# Altium PCB ESP32_PCB.PcbDoc (part 2 of 2)
Units mil, origin at the board's own origin, x right, y up, seen from the top; angles counter-clockwise.
Board outline 2700 x 1000 mil, 4 copper layers (L1, L2, L3, L4), stack 61.581 mil thick; 64 components, 73 nets, 299 pads, 161 vias.
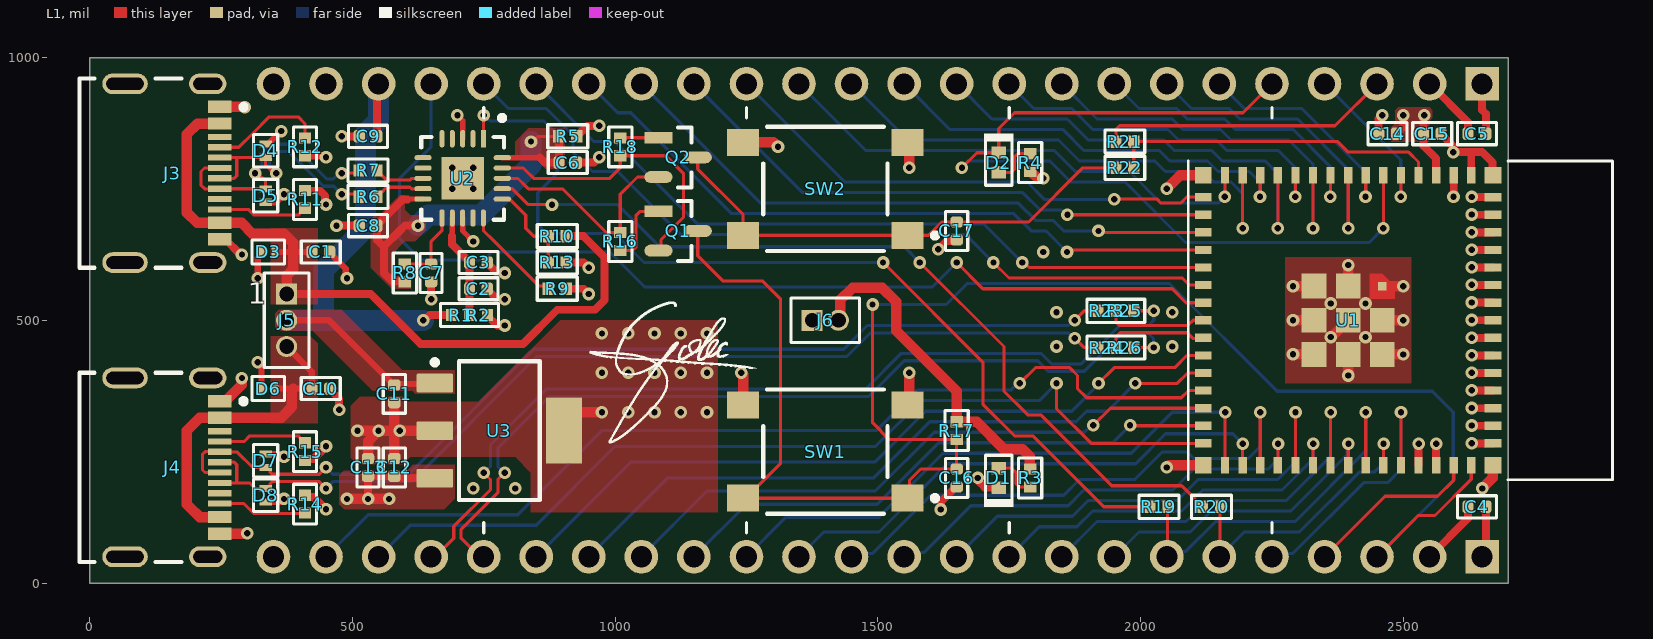
[diagram p0: L1 view]

## Via types
v1: diameter 24, hole 12, L1 to L4, tented both sides, 161 vias

## Nets (pads, with @x,y where several pads share a name; then routed paths per layer and width w, separated by ;. In a path a pad name is that pad's centre, name@x,y a point inside that pad or via, vN(x,y) a via of type N, cw(c..) or ccw(c..) an arc to the next point about the centre after c; other vN are vias at no path point) (continued)
+3V3: (continued)
  L1 w15: R2.1 757.01,508.82 775.83,490 v1(790,490) ; R5.1 927.01,851.18 930.14,854.31 931.32,854.31 947.01,870 v1(970,870) ; C14.2 2486.93,856.18 2490.06,859.31 2491.21,859.31 2500,868.1 v1(2500,890) ; v1(2540,890) 2538.07,888.07 2538.07,831.93 2562.36,807.64 U1.3 ; J1.2 2623.07,876.93 C5.2 ; J2.1 2656.93,56.93 C4.2
  L1 w20: J6.2 1428.83,503.83 1428.83,538.83 1452,562 1508,562 1535,535 1535,480 1650,365 R17.2 1687.99,307.01 1740,255 1775,255 1789.06,240.94 1789.06,217.64 1789.69,217.01 R3.2 ; R4.2 1791.18,782.99 1804.17,770 v1(1815,770)
  L2 w15: v1(2500,890) v1(2540,890)
  L2 w20: 2516.57,830 2516.57,813.43 2563.39,766.61 2563.39,336.61 2595,305 2595,105 J2.1
  L2 w40: v1(790,490) 799.4,490 832,522.6 832,607.4 790,649.4 790,849.4 822.6,882 830,882 958,882 v1(970,870) 1110,870 1255,725 1420,725 ; J6.2 1425,720 1420,725 ; J1.2 2545.41,945.41 2545.41,895.41 v1(2540,890) 2540,853.43 2516.57,830 1875,830 v1(1815,770) 1770,725 1420,725
+3V3_FTDI: C6.2 C8.2 R5.2 R8.1 U2.10 U2.20 | length 857.3
  L1 w6: v1(840,840) 843.79,840 853.79,850 R5.2
  L1 w10.01: 605,730 605.63,730.63 U2.10 ; U2.20 857.1,809.37
  L1 w15: C8.2 546.93,653.07 560,640 ; C8.2@546.93,681.18 595.75,730 605,730 ; R8.1 599.37,573.63 576.37,573.63 560,590 560,640 ; v1(625,680) 600,680 590,670 560,640 ; 857.1,809.37 866.47,800 C6.2 ; R5.2 R5.2 C6.2@893.03,801.22
  L4 w40: v1(625,680) 645,700 745,700 840,795 v1(840,840)
+3V3_REG: C12.2 C13.2 J6.1 U3.3 | length 1238.4
  L1 w15: v1(530,160) C13.2 C12.2 583.07,200 656.42,200 U3.3
  L1 w20: v1(490,160) v1(530,160) v1(570,160)
  L2 w40: v1(570,160) 595,160 660,225 ; 1335,460 J6.1
  L2 w60: 660,225 708,273 1218,273 1335,390 1335,460
+5V: C9.2 C11.2 J1.22 J5.2 R1.1 U3.1 | length 1247.3
  L1 w12: J5.2 455.75,500 578.82,376.93 C11.2 581.81,378.74 655.16,378.74 U3.1
  L1 w15: C9.2 546.93,946.93 J1.22 ; v1(635,500) 637.44,500 647.44,510 R1.1
  L4 w40: J5.2 445,500 ; J1.22 550,880 525,855 525,675.6 445,595.6 445,500 ; v1(635,500) 445,500
+5V_VBUS1: C1.2 D3.2 J3.A4B9 J3.B4A9 J5.1 R10.2 | length 1469.7
  L1 w12: D3.2 387.93,630 C1.2
  L1 w15: J5.1 535,550 630,455 825,455 890,520 961.72,520 980,538.28 980,620 940,660 R10.2
  L1 w20: J3.A4B9 205.59,874.41 185,853.82 185,705 204.57,685.43 J3.B4A9 289.57,685.43 310,665 370,665 387.93,647.07 387.93,630 387.93,597.93 375,585 J5.1
+5V_VBUS2: C10.2 D6.2 J4.A4B9 J4.B4A9 J5.3 | length 637.8
  L1 w12: D6.2 387.93,370 C10.2 423.07,401.93 J5.3
  L1 w20: J4.B4A9 209.41,125.59 190,145 185,150 185,290 209.57,314.57 J4.A4B9 364.57,314.57 385,335 385,367.07 387.93,370
+VCC_FTDI: C2.2 C3.2 R1.2 R2.2 U2.12 | length 198.4
  L1 w10.01: 690,660 690.32,660.32 U2.12
  L1 w15: 690,660 690,644.25 723.07,611.18 C3.2 C2.2 723.03,559.96 R1.2 R1.2
BTN_GPIO0: C17.2 Q2.3 R22.1 SW2.1 SW2.2 | length 947
  L1 w6: Q2.3 1157.42,787.58 1243.5,701.5 SW2.2 SW2.1 1596.42,661.42 1621.93,686.93 C17.2 1786.93,686.93 1890,790 R22.1
CHIP_PU: C16.2 J2.3 Q1.3 R17.1 SW1.1 SW1.2 U1.45 | length 3372.2
  L1 w6: Q1.3 1157.42,622.58 1205,575 1280,575 1315,540 1315,227.99 SW1.2@1248.43,161.42 ; SW1.2 SW1.2@1248.43,161.42 ; v1(1490,530) 1490,305 1522.01,272.99 R17.1 C16.2 1581.93,216.93 1560,195 1560,164.92 SW1.1 SW1.2@1248.43,161.42 ; J2.3 2528.46,128.46 2560.28,128.46 2629.29,197.48 U1.45
  L4 w6: v1(1490,530) 1630,530 1670,570 2055,570 2260,365 2555,365 2595,325 2595,195 J2.3
CON1_USB_N: D4.2 J3.A7 J3.B7 R6.1 | length 445.4
  L1 w6.03: J3.A7 247.72,770 275,770 280,775 280,809.72 ; J3.B7 247.91,809.72 280,809.72 ; v1(355,780) 350.53,780 335,795.53 D4.2 334.72,809.72 280,809.72 ; v1(480,740) 507.99,740 R6.1
  L4 w6.03: v1(355,780) 342.01,792.99 342.01,812.01 350.97,820.97 379.19,820.97 445.16,755 465,755 v1(480,740)
CON1_USB_P: D5.2 J3.A6 J3.B6 R7.1 | length 500.8
  L1 w6.03: J3.A6 218.76,789.76 212,783 212,757 219,750 247.24,750 J3.B6 247.83,750.2 334.8,750.2 D5.2 335,764.47 319.47,780 v1(315,780) ; v1(480,780) 507.99,780 R7.1
  L4 w6.03: v1(315,780) 327.99,792.99 327.99,817.83 345.16,835 385,835 450.97,769.03 464.17,769.03 475.14,780 v1(480,780)
CON2_USB_N: D7.2 J4.A7 J4.B7 R23.1 | length 1931.3
  L1 w6.03: J4.A7 219.76,210.24 215,215 215,245 220,250 247.24,250 J4.B7 280.39,249.61 310,220 D7.2 339.92,220 343.8,216.13 343.8,210.55 347.33,207.01 437.01,207.01 v1(450,220) ; v1(1875,500) 1893,518 R23.1
  L4 w6.03: v1(450,220) 462.99,207.01 607.17,207.01 845.16,445 1435.16,445 1480.17,490.01 1862.48,490.01 1872.47,500 v1(1875,500)
CON2_USB_P: D8.2 J4.A6 J4.B6 R24.1 | length 1892.6
  L1 w6.03: J4.B6 304.45,190.55 315,180 D8.2 339.92,180 343.8,183.87 343.8,189.45 347.33,192.99 437.01,192.99 v1(450,180) ; J4.A6 247.72,230 275,230 280,225 280,191.09 279.82,190.91 ; v1(1875,466) 1893,448 R24.1
  L4 w6.03: v1(450,180) 462.99,192.99 612.99,192.99 850.97,430.97 1440.97,430.97 1485.99,475.99 1862.48,475.99 1872.47,466 v1(1875,466)
CON_ESP_USB_N: J2.21 R25.1 | length 1708.6
  L1 w6.03: J2.21 657.99,50 692.99,85 692.99,107.83 762.99,177.83 762.99,197.01 v1(750,210) ; R25.1 v1(2025,518)
  L4 w6.03: v1(750,210) 751.2,210 762.99,221.78 762.99,262.83 869.19,369.03 1476.64,369.03 1544.66,437.05 1810.47,437.05 1830.47,417.05 1887.2,417.05 1960.17,490.01 2015.01,490.01 2025,500 v1(2025,518)
CON_ESP_USB_P: J2.20 R26.1 | length 1684.8
  L1 w6.03: J2.20 742.01,50 707.01,85 707.01,102.01 777.01,172.01 777.01,197.01 v1(790,210) ; R26.1 v1(2025,448)
  L4 w6.03: v1(790,210) 788.8,210 777.01,221.78 777.01,257.01 875,355 1482.45,355 1550.47,423.01 1804.66,423.01 1824.66,403.01 1893.01,403.01 1965.99,475.99 2014.01,475.99 2024.65,465.35 2024.65,448.35 v1(2025,448)
CON_GPIO0: J1.3 R21.1 | length 556
  L1 w6: R21.1 1952.99,862.99 1960,870 2370,870 J1.3
DTR_FTDI: Q2.2 R16.1 U2.18 | length 426.3
  L1 w6: U2.18 785.65,769.77 815.23,769.77 830,755 835,750 900,750 982.99,667.01 R16.1 1010,740 1042.6,772.6 Q2.2
ESP_USB_N: R23.2 R25.2 U1.23 | length 194.3
  L1 w6.03: R23.2 1952.99,497.01 1959.72,490.28 2090.28,490.28 2100,500 U1.23
ESP_USB_P: R24.2 R26.2 U1.24 | length 193
  L1 w6.03: R24.2 1952.99,467.99 1961.25,476.25 2088.75,476.25 2100,465 U1.24@2117.91,465
FTDI_RESET: C7.2 R8.2 U2.11 | length 146.2
  L1 w6: R8.2 R8.2 649.96,606.97 C7.2 650,650 670.4,670.4 670.4,694.36 U2.11
FTDI_USB_N: R6.2 U2.9 | length 97.2
  L1 w6.03: R6.2 547.01,736.18 554.62,743.8 555.8,743.8 565.15,753.14 609.86,753.14 613,750 634.27,750 U2.9
FTDI_USB_P: R7.2 U2.8 | length 96.8
  L1 w6.03: R7.2 547.01,783.82 554.62,776.2 555.8,776.2 564.84,767.17 610.17,767.17 613,770 U2.8
GND: C1.1 C2.1 C3.1 C4.1 C5.1 C6.1 C7.1 C8.1 C9.1 C10.1 C11.1 C12.1 C13.1 C14.1 C15.1 C16.1 C17.1 D1.1 D3.1 D4.1 D5.1 D6.1 D7.1 D8.1 J1.1 J1.23 J2.2 J2.24 J3.A1B12 J3.B1A12 J3.S1 J3.S2 J3.S3 J3.S4 J4.A1B12 J4.B1A12 J4.S1 J4.S2 J4.S3 J4.S4 R9.2 R11.1 R12.1 R13.2 R14.1 R15.1 SW1.3 SW1.4 SW2.3 SW2.4 U1.1 U1.2 U1.42 U1.43 U1.46 U1.47 U1.48 U1.49 U1.50 U1.51 U1.52 U1.53 U1.54 U1.55 U1.56 U1.57 U1.58 U1.59 U1.60 U1.61 U1.62 U1.63 U1.64 U1.65 U1.66 U1.67 U1.68 U1.69 U1.70 U1.71 U1.72 U1.73 U2.3 U2.13 U2.21 U3.2 U3.4 | length 3767.8
  L1 w10.01: v1(700,890) 710,880 U2.3 ; U2.13 710.23,694.35 710.23,669.77 v1(730,650)
  L1 w12: v1(320,420) 327.2,412.8 D6.1 ; v1(320,580) 320,617.87 327.2,625.08 D3.1 ; D8.1 364.41,154.41 v1(370,160) ; D7.1 364.41,245.59 v1(370,240) ; D5.1 335.37,724.78 354.78,724.78 v1(370,740) ; D4.1 339.92,835.59 364.33,860 v1(365,860) ; C1.1 456.93,628.82 487.7,598.04 487.7,582.3 v1(490,580)
  L1 w15: J3.B1A12 258.46,653.94 287.4,625 v1(290,625) ; R14.1 411.18,167.01 414.31,163.88 426.3,163.88 v1(450,140.18) ; R15.1 413.13,236.12 426.3,236.12 450,259.82 v1(450,260) ; R11.1 410.63,746.37 438.63,746.37 448.28,736.72 448.28,721.9 v1(450,720.18) ; R12.1 447.01,812.99 v1(450,810) ; C10.1 456.93,368.82 475,350.75 v1(475,330) ; v1(470,680) C8.1 ; v1(480,850) C9.1 ; v1(650,540) C7.1 ; C2.1 756.93,558.82 775.75,540 v1(790,540) ; C3.1 756.93,608.82 775.75,590 v1(790,590) ; R9.2 940,560 v1(950,550) ; R13.2 940,610 v1(950,600) ; C6.1 960,800 v1(970,810) ; v1(1615,635) 1631.06,651.06 1647.98,651.06 C17.1 ; v1(1620,140) 1620,154.25 1648.82,183.07 C16.1 ; v1(1690,200) 1691.72,198.28 1691.72,193.56 1703.29,182 1729.3,182 D1.1 ; C14.1 2453.07,883.07 v1(2460,890) ; U1.42 v1@2528.9,264.57 ; J2.2 2623.07,123.07 C4.1 ; U1.43 v1@2562.36,264.57 ; C15.1 2571.93,853.82 2595,830.75 v1(2595,820) 2630,820 ; v1@2595.83,735.43 U1.2 ; U1.1 2629.29,819.29 2630,820 ; v1@2630.47,265.75 U1.46 ; v1@2630.47,299.21 U1.47 ; v1@2630.47,332.68 U1.48 ; v1@2630.47,366.14 U1.49 ; v1@2630.47,399.61 U1.50 ; v1@2630.47,433.07 U1.51 ; v1@2630.47,466.54 U1.52 ; v1@2630.47,500 U1.53 ; v1@2630.47,533.46 U1.54 ; v1@2630.47,566.93 U1.55 ; v1@2630.47,600.39 U1.56 ; v1@2630.47,633.86 U1.57 ; v1@2630.47,667.32 U1.58 ; v1@2630.47,700.79 U1.59 ; v1@2630.47,734.25 U1.60 ; J1.1 2650,900 2656.93,893.07 C5.1 ; U1.62 2670,776.22 2670,800 2650,820 2630,820
  L1 w20: J4.B1A12 299.09,94.09 v1(300,95) ; J4.A1B12 258.46,346.06 290,377.6 v1(290,390) ; J3.A1B12 294.09,905.91 v1(295,905) ; v1(510,290) v1(550,290) ; C13.1 530,270 v1(550,290) ; C12.1 580,278.92 ; 580,301.08 C11.1 ; U3.2 v1(590,290) v1(550,290) ; U3.4 903.03,300.55 927.48,325 v1(975,325) ; v1(1240,400) 1243.5,396.5 SW1.4 ; SW2.4 1301.42,838.58 v1(1310,830) ; SW1.3 1560,342.09 v1(1560,400) ; SW2.3 1560,835.08 v1(1560,790) ; v1(2050,220) 2054.41,224.41 U1.64 ; v1(2050,750) 2075.59,775.59 U1.63 ; v1(2290,435.08) U1.73@2330.04,435.08 ; v1(2290,500.04) U1.72@2330.04,500.04 ; v1(2290,565) 2330.04,565 U1.71 ; v1(2362,468) 2363.04,468 U1.61 ; v1(2395,394.96) U1.70 ; U1.69@2395.08,565 v1(2395.08,605.04) ; U1.68 v1(2500.08,435) ; U1.67 v1(2500.08,499.96) ; U1.66@2460.04,564.92 v1(2500.08,564.92) ; v1(2650,180) 2670,200 2670,223.78 U1.65
  other v1: 730,180 810,180 2529.33,265 2562.8,265 2630.04,266.18 2630.04,299.65 1025,325 1075,325 1125,325 1175,325 2630.04,333.11 2630.04,366.57 975,400 1025,400 1075,400 1125,400 1175,400 2630.04,400.04 2630.04,433.5 1840,450 2060,450 2630.04,466.97 2428,468 975,475 1025,475 1075,475 1125,475 1175,475 2630.04,500.43 1840,515 2060,515 2362,532 2428,532 2630.04,533.9 2630.04,567.36 2630.04,600.83 1815,630 2630.04,634.29 2630.04,667.76 2630.04,701.22 2595.39,735 2630.04,734.69 690,750 730,750 690,790 730,790
GPIO0: R21.2 R22.2 U1.4 | length 633.5
  L1 w6: R22.2 R21.2 2375,840 2395,820 2510,820 2528.9,801.1 U1.4
GPIO1: J1.4 U1.5 | length 315.8
  L1 w6: v1(2495,735) 2495.43,735.43 U1.5
  L4 w6: J1.4 2495,805 v1(2495,735)
GPIO2: D2.1 J1.5 U1.6 | length 1666.6
  L1 w6: v1(1660,790) 1688.7,818.7 D2.1 1730,865 1760,895 2195,895 J1.5 ; v1@2461.97,675.04 U1.6
  L4 w6: v1(1660,790) 1673,803 1827.29,803 1867.29,763 1970.53,763 2085.53,648 2434.93,648 v1(2461.93,675)
GPIO3: J1.6 U1.7 | length 434.8
  L1 w6: v1@2428.5,735.43 U1.7
  L4 w6: J1.6 2197,903 2307,903 2428.07,781.93 v1(2428.07,735)
GPIO4: J1.7 U1.8 | length 625
  L1 w6: v1(2395,675) v1(2395,675) U1.8
  L4 w6: J1.7 2097,903 2168.72,903 2188.72,883 2298.72,883 2395,786.72 v1(2395,675)
GPIO5: J1.8 U1.9 | length 573.9
  L1 w6: v1@2361.57,735.43 U1.9
  L4 w6: J1.8 1997,903 2068.72,903 2088.72,883 2160.43,883 2180.43,863 2290.43,863 2361.14,792.29 v1(2361.14,735)
GPIO6: J1.9 U1.10 | length 764
  L1 w6: v1(2328.07,675) U1.10
  L4 w6: J1.9 1917,883 2060.43,883 2080.43,863 2152.15,863 2172.15,843 2282.15,843 2328.07,797.08 v1(2328.07,675)
GPIO7: J1.10 U1.11 | length 706.1
  L1 w6: v1@2294.65,735.43 U1.11
  L4 w6: J1.10 1797,903 1868.72,903 1908.72,863 2052.15,863 2072.15,843 2143.86,843 2163.86,823 2262,823 2294.21,790.79 v1(2294.21,735)
GPIO8: J1.11 U1.12 | length 886.4
  L1 w6: v1@2261.18,675.04 U1.12
  L4 w6: J1.11 1717,883 1860.43,883 1900.43,843 2043.86,843 2063.86,823 2135.58,823 2155.58,803 2237,803 2261.14,778.86 v1(2261.14,675)
GPIO9: J1.12 U1.13 | length 822.1
  L1 w6: v1@2227.72,735.43 U1.13
  L4 w6: J1.12 1637,863 1852.15,863 ; 1852.57,862.57 1892.15,823 2035.58,823 2055.58,803 2127.29,803 2147.29,783 2207,783 2227.28,762.72 v1(2227.28,735)
GPIO10: J1.13 U1.14 | length 997.2
  L1 w6: v1@2194.25,675.04 U1.14
  L4 w6: J1.13 1557,843 1843.86,843 1883.86,803 2027.29,803 2047.29,783 2119.01,783 2139.01,763 2172,763 2194.21,740.79 v1(2194.21,675)
GPIO11: J1.14 U1.15 | length 949.5
  L1 w6: v1@2160.79,735.43 U1.15
  L4 w6: J1.14 1477,823 1835.58,823 1875.58,783 1978.82,783 2038.82,723 2147.5,723 2159.5,735 v1(2160.35,735)
GPIO12: J1.15 U1.16 | length 968.9
  L1 w6: v1(1950,730) 1950.91,730.91 2030.91,730.91 2038.82,723 2076.22,723 2087.48,734.25 U1.16
  L4 w6: J1.15 1437,763 1783.82,763 1816.82,730 v1(1950,730)
GPIO13: J1.16 U1.17 | length 1073.8
  L1 w6: v1@1860,700 v1(1860.79,700.79) U1.17
  L4 w6: J1.16 1357,743 1775.53,743 1808.53,710 1847.79,710 1857,700.79 v1(1860.79,700.79)
GPIO14: J1.17 U1.18 | length 1186.5
  L1 w6: v1(1920,670) 1922.68,667.32 U1.18
  L4 w6: J1.17 1277,723 1767.25,723 1800.25,690 1833.39,690 1853.39,670 v1(1920,670)
GPIO15: J1.18 U1.19 | length 1303.6
  L1 w6: v1(1860,630) 1863.86,633.86 U1.19
  L4 w6: J1.18 1005,895 1030,895 1222,703 1758.96,703 1791.96,670 1820,670 v1(1860,630)
GPIO16: J1.19 U1.20 | length 1414.3
  L1 w6: v1(1775,610) 1778.25,610 1787.86,600.39 U1.20
  L4 w6: J1.19 960,840 1000,840 1157,683 1702,683 v1(1775,610)
GPIO17: J1.20 U1.21 | length 1546.7
  L1 w6: v1(1720,610) 1749.61,580.39 2079.61,580.39 2093.07,566.93 U1.21
  L4 w6: J1.20 797,903 868.72,903 920,851.72 920,820 957,783 1005,783 1125,663 1667,663 v1(1720,610)
GPIO18: J1.21 U1.22 | length 1951
  L1 w6: v1(1650,610) 1700,560 2060,560 2086.54,533.46 U1.22
  L4 w6: J1.21 650,830 590,770 590,655 630,615 750,615 765,630 990,630 1057,563 1603,563 v1(1650,610)
GPIO21: J2.19 U1.25 | length 1429.1
  L1 w6: v1(1920,380) 1950,410 2065,410 2088.07,433.07 U1.25
  L4 w6: J2.19 1030,230 1493.83,230 1590.83,327 1868.72,327 1920,378.28 v1(1920,380)
GPIO26: J2.18 U1.26 | length 1314.3
  L1 w6: v1(1990,380) 2070,380 2089.61,399.61 U1.26
  L4 w6: J2.18 1100,200 1492.11,200 1599.11,307 1877,307 1897,327 1937,327 v1(1990,380)
GPIO33: J2.17 U1.28 | length 1186.5
  L1 w6: v1(1910,300) 1942.68,332.68 U1.28
  L4 w6: J2.17 1175,175 1495.4,175 1607.4,287 1893.21,287 1906.21,300 v1(1910,300)
GPIO34: J2.16 U1.29 | length 1073.3
  L1 w6: v1(1980,300) 1980.79,299.21 U1.29
  L4 w6: J2.16 1250,150 1498.68,150 1615.68,267 1947,267 v1(1980,300)
GPIO35: J2.15 U1.31 | length 1125.3
  L1 w6: U1.31 v1(2160.83,325)
  L4 w6: J2.15 1325,125 1501.96,125 1623.96,247 1982.25,247 2060.25,325 v1(2160.83,325)
GPIO36: J2.14 U1.32 | length 989.6
  L1 w6: U1.32 v1@2194.25,264.57
  L4 w6: J2.14 1397,97 1502.25,97 1632.25,227 1990.53,227 2047.53,284 2175.69,284 v1(2194.69,265)
GPIO37: J2.13 U1.33 | length 1040.3
  L1 w6: U1.33 v1@2227.72,324.96
  L4 w6: J2.13 1456.47,56.47 1490,56.47 1600.53,167 1853.86,167 1883.86,197 1988.82,197 2040.82,249 2089,249 2101,237 2204.87,237 2227.76,259.89 v1(2227.76,325)
GPIO38: J2.12 U1.34 | length 858
  L1 w6: U1.34 v1@2261.18,264.57
  L4 w6: J2.12 1558.23,58.23 1588.23,58.23 1677,147 1862.15,147 1892.15,177 2061.58,177 2101.58,217 2243,217 2261.61,235.61 v1(2261.61,265)
GPIO39: J2.11 U1.35 | length 914.3
  L1 w6: U1.35 v1@2294.65,324.96
  L4 w6: J2.11 1727,127 1870.43,127 1900.43,157 2069.86,157 2109.86,197 2260.83,197 2294.69,230.86 v1(2294.69,325)
GPIO40: J2.10 U1.36 | length 724.5
  L1 w6: U1.36 v1@2328.11,264.57
  L4 w6: J2.10 1807,107 1878.72,107 1908.72,137 2078.15,137 2118.15,177 2269.11,177 2328.54,236.43 v1(2328.54,265)
GPIO41: J2.9 U1.37 | length 775.2
  L1 w6: U1.37 v1(2361.61,325)
  L4 w6: J2.9 1917,117 2086.43,117 2126.43,157 2277.4,157 2361.61,241.22 v1(2361.61,325)
GPIO42: J2.8 U1.38 | length 585.4
  L1 w6: U1.38 v1@2395.04,264.57
  L4 w6: J2.8 1997,97 2094.72,97 2134.72,137 2285.68,137 2392.79,244.11 2392.79,262.32 v1(2395.47,265)
GPIO45: J2.5 U1.41 | length 523.5
  L1 w6: U1.41 v1@2495.43,324.96
  L4 w6: J2.5 2256.47,56.47 2290,56.47 2424.53,191 2470,191 2495.47,216.47 v1(2495.47,325)
GPIO46: J2.4 U1.44 | length 334.8
  L1 w6: J2.4 2465,165 2565,165 2595.83,195.83 U1.44
GPIO47: J2.23 U1.27 | length 1862.5
  L1 w6: v1(1770,380) 1800,410 1865,410 1880,395 1880,370 1897.32,352.68 2077.68,352.68 2091.14,366.14 U1.27
  L4 w6: J2.23 530,130 815,130 975,290 1497.26,290 1574.26,367 1753.21,367 1766.21,380 v1(1770,380)
GPIO48: J2.22 U1.30 | length 1781.7
  L1 w6: v1(1840,380) 1840,331.82 1906.07,265.75 U1.30
  L4 w6: J2.22 610,110 850,110 1000,260 1495.54,260 1582.54,347 1807,347 v1(1840,380)
NetD1_2: D1.2 R3.1 | length 87.1
  L1 w6: D1.2 1754.29,218.7 1763.13,209.86 1763.13,188.85 1768.99,182.99 R3.1
NetD2_2: D2.2 R4.1 | length 88.8
  L1 w6: D2.2 1754.14,781.3 1760,787.16 1760,811.15 1765.86,817.01 R4.1
NetJ3_A5: J3.A5 R12.2 | length 218.8
  L1 w6: J3.A5 284.13,829.13 310,855 342,887 397.14,887 410,874.14 R12.2
NetJ3_B5: J3.B5 R11.2 | length 173
  L1 w6: J3.B5 302.13,711.02 313.15,700 397.01,700 403.19,706.18 403.19,707.36 408.82,712.99 R11.2
NetJ4_A5: J4.A5 R15.2 | length 172.9
  L1 w6: J4.A5 294.29,269.29 305,280 310,280 397.01,280 403.19,273.82 403.19,272.64 408.82,267.01 R15.2
NetJ4_B5: J4.B5 R14.2 | length 169.6
  L1 w6: J4.B5 293.82,151.18 312.48,132.52 R14.2@409.53,132.52
NetQ1_1: Q1.1 R16.2 | length 138.5
  L1 w6: R16.2 1032.99,632.99 1040,640 1040,700 1046.71,706.71 1081.89,706.71 Q1.1
NetQ2_1: Q2.1 R18.2 | length 72.7
  L1 w6: R18.2 1010.2,847.2 1082.38,847.2 Q2.1
NetR9_1: R9.1 U2.15 | length 193.4
  L1 w6: U2.15 749.6,694.36 749.6,670.4 770,650 854.67,565.33 867.66,565.33 R9.1
RTS_FTDI: Q1.2 R18.1 U2.19 | length 564.7
  L1 w6: U2.19 825.32,789.68 830,785 845,770 908.29,770 990,770 1010,790 R18.1 1097.01,812.99 1130,780 1130,695.63 1087.37,653 1087.37,637.39 Q1.2
RXD_FTDI: R19.2 U2.1 | length 1821
  L1 w6: U2.1 749.6,845.64 749.6,889.6 v1(750,890) ; v1(1510,610) 1700,420 1700,340 1760,280 1795,280 1930,145 R19.2
  L4 w6: v1(750,890) 752.07,890 762.86,879.22 864.22,879.22 890,853.43 890,780 853,743 853,682 870,665 1000,665 1055,610 v1(1510,610)
TXD_FTDI: R20.2 U2.17 | length 1633.8
  L1 w6: U2.17 804.68,750.32 835,720 v1(880,720) ; v1(1580,610) 1740,450 1740,365 1785,320 1810,320 1945,185 2077.99,185 2111.18,151.81 2112.36,151.81 2117.99,146.18 R20.2
  L4 w6: v1(880,720) 1005,720 1085,640 1550,640 v1(1580,610)
U0RXD: J2.6 R20.1 U1.40 | length 558.9
  L1 w6: J2.6 2151,51 2151,144 R20.1 ; U1.40 v1@2461.97,264.57
  L4 w6: J2.6 2197,97 2302.25,97 2416.25,211 2445,211 2462.4,228.4 v1(2462.4,265)
U0TXD: J2.7 R19.1 U1.39 | length 731.8
  L1 w6: J2.7 2051,51 2051,144 R19.1 ; U1.39 v1(2428.54,325)
  L4 w6: J2.7 2060.23,60.23 2086.23,60.23 2143,117 2293.96,117 2428.54,251.58 v1(2428.54,325)
VBUS_SENSE: R10.1 R13.1 U2.16 | length 181.5
  L1 w6: U2.16 799.37,730.63 830,700 830,675 845,660 R10.1 R13.1
pads on no net: J1.24 J3.A8 J3.B8 J4.A8 J4.B8 U2.2 U2.4 U2.5 U2.6 U2.7 U2.14

## Polygon pours and split planes (outlines as drawn)
GND on L1 "GND_L01_P018" (solid, pour order 18): 1195,135 1195,500 895,500 740,345 606,345 597,354 514,354 497,337 497,238 509,226 596,226 610,240 810,240 840,210 840,135 915,135
GND on L1 "GND_L01_P017" (solid, pour order 17): 2275,620 2515,620 2515,380 2275,380
+5V_VBUS2 on L1 "+5V_VBUS2_L01_P016" (solid, pour order 16): 345,470 420,470 434,456 434,304 345,304
+5V_VBUS1 on L1 "+5V_VBUS1_L01_P012" (solid, pour order 12): 345,530 434,530 434,675 345,675
+5V on L1 "+5V_L01_P010" (solid, pour order 10): 695,360 695,405 595,405 480,520 360,520 353,513 353,487 360,480 425,480 539,366 614,366 620,360
+3V3_REG on L1 "+3V3_REG_L01_P009" (solid, pour order 9): 695,225 695,160 675,140 485,140 475,150 475,205 484,214 604,214 615,225
+3V3_FTDI on L1 "+3V3_FTDI_L01_P008" (solid, pour order 8): 612,560 575,560 535,600 535,683 535,692 542,699 551,699 590,738 600,738 600,710 610,700 630,700 640,690 640,670 620,650 600,650 574,624 574,590 580,584 612,584
+3V3_FTDI on L1 "+3V3_FTDI_L01_P007" (solid, pour order 7): 904,865 904,788 867,788 850,805 810,805 810,840 835,865
+3V3 on L1 "+3V3_L01_P002" (solid, pour order 2): 2476,866 2476,840 2549,840 2549,879 2555,885 2555,900 2550,905 2490,905 2485,900 2485,875
GND on L2 "GND_L02_P025" (solid, remove dead copper, pour order 25): 20,20 2680,20 2680,980 20,980
+3V3 on L2 "+3V3_L02_P020" (solid, pour order 20): 2680,20 2680,980 920,980 920,840 1100,840 1200,740 1200,620 1340,620 1405,555 1405,479 1460,479 1460,620 1500,660 1780,660 1900,780 2040,780 2060,800 2500,800 2520,780 2520,220 2480,180 2380,180 2320,120 2320,20
+3V3_REG on L2 "+3V3_REG_L02_P022" (solid, pour order 22): 477,140 695,140 695,225 477,225
GND on L3 (split plane): 2699.95,0.05 0.05,0.05 0.05,999.95 2699.95,999.95

## Silkscreen, mask and mechanical layers (free items; w line width, h text height)
Top Overlay:
  drawing of 10 lines, arcs and shapes, not listed
Board Shape:
  the board outline again, w20

## Text inside footprints (layer, text, board x,y; h text height)
J1: Bottom Overlay "1" at 2626,1021 h40 r270
J2: Bottom Overlay "1" at 2627,-34 h40 r270
J5: Top Overlay "1" at 301,531 h40